# EAGLE board imu_xy (EAGLE 4.11)
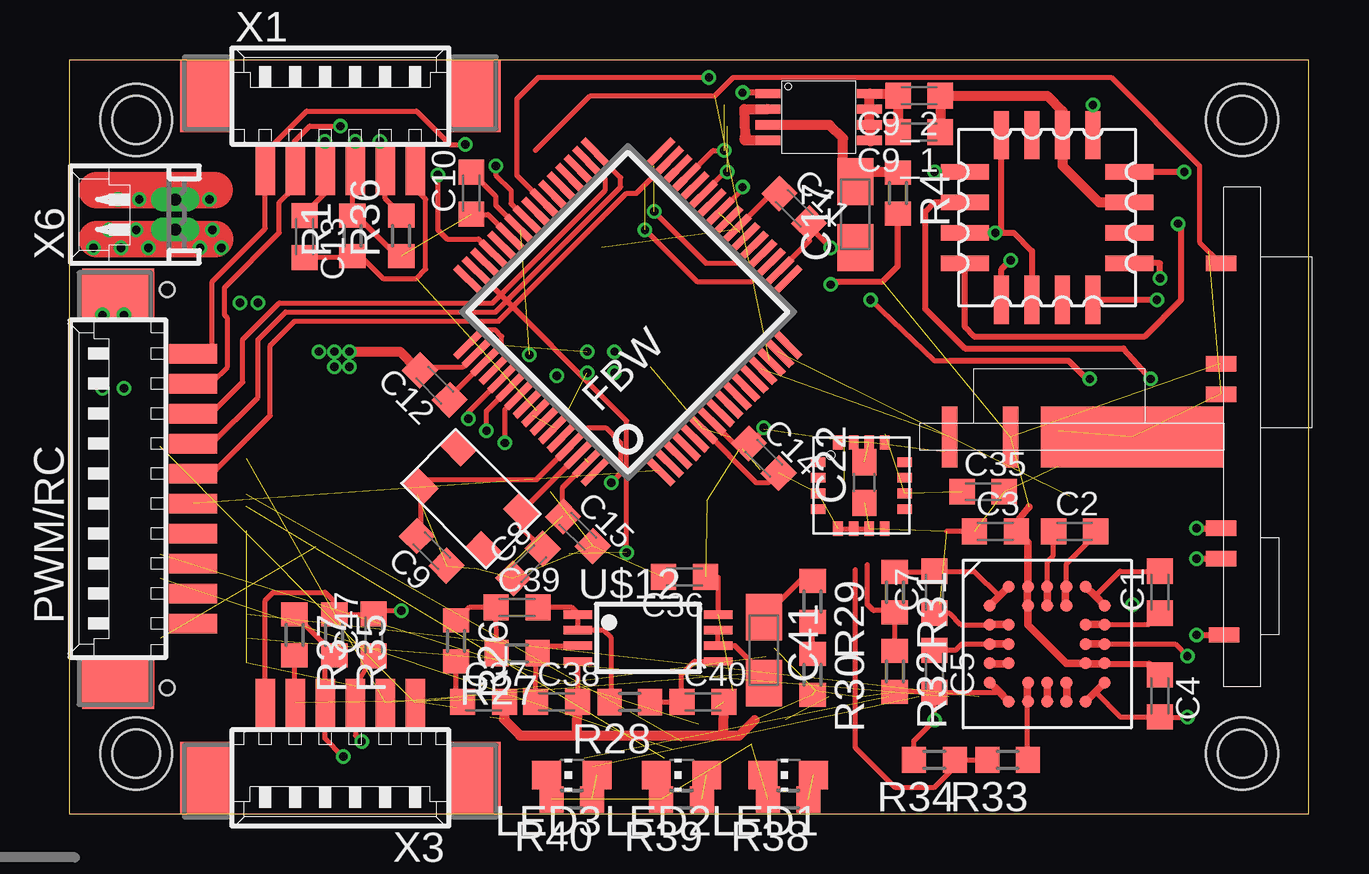
[diagram p0: board, top side]
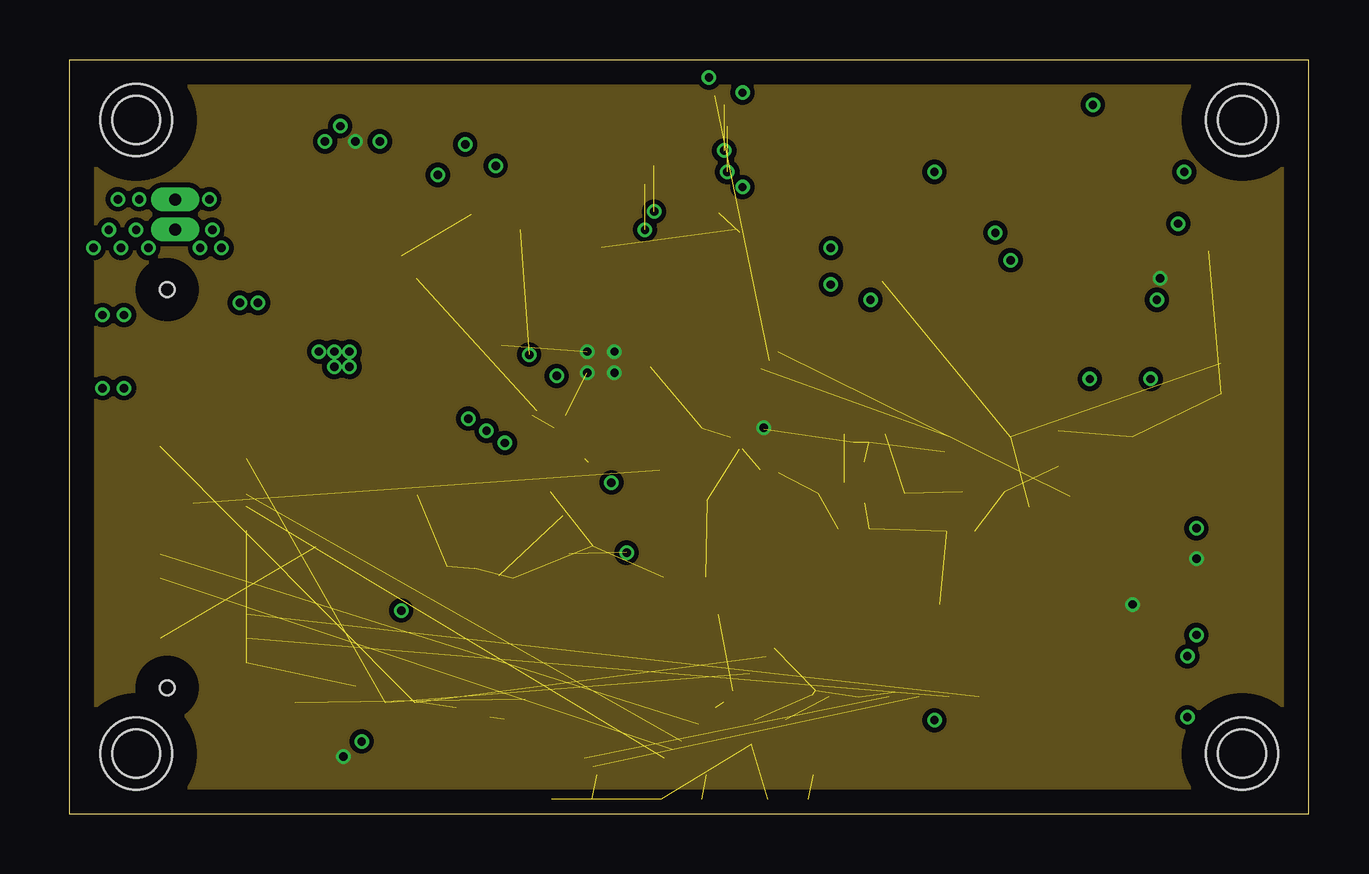
[diagram p1: board, inner layer $Route2]
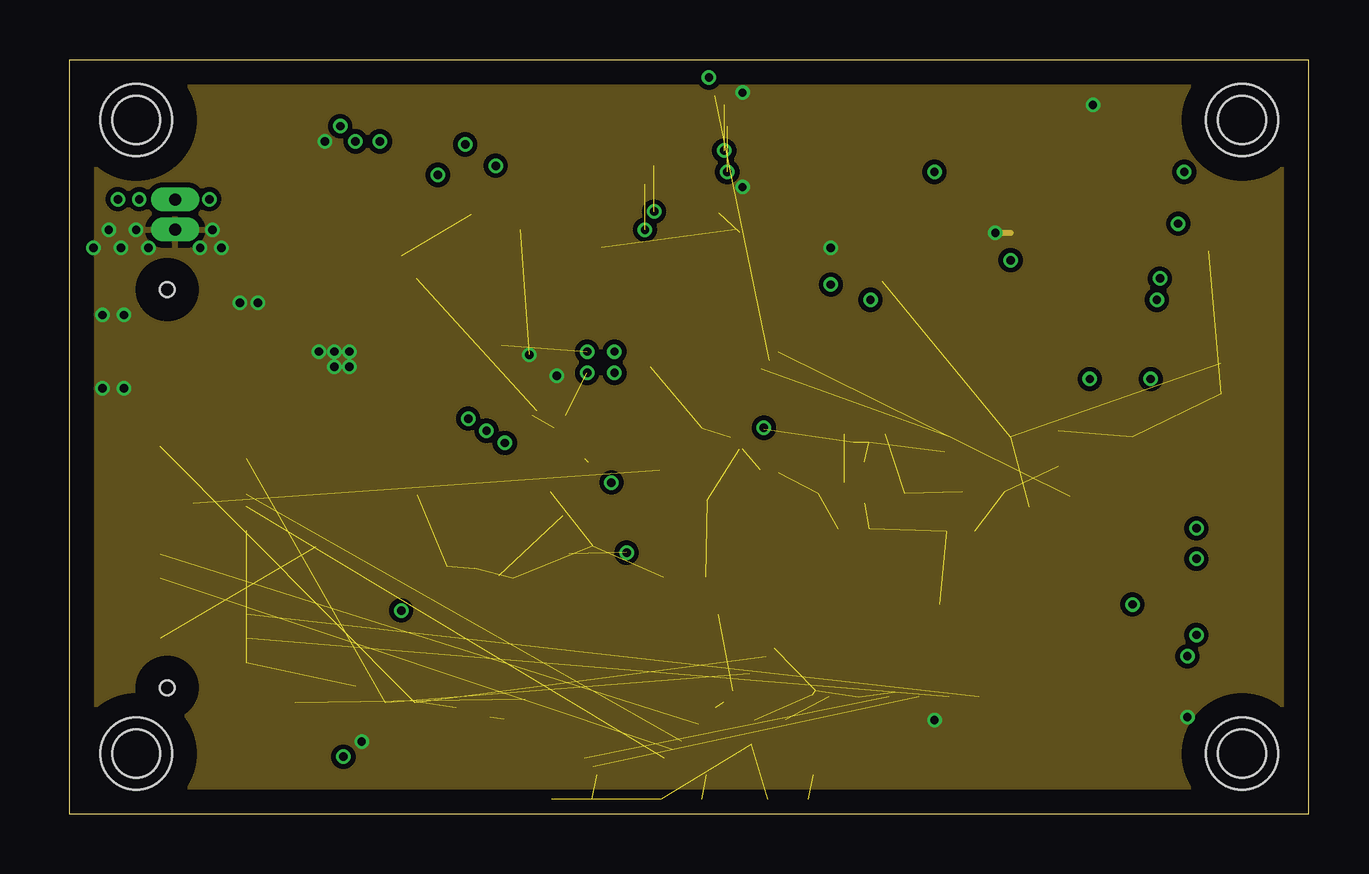
[diagram p2: board, inner layer $Route15]
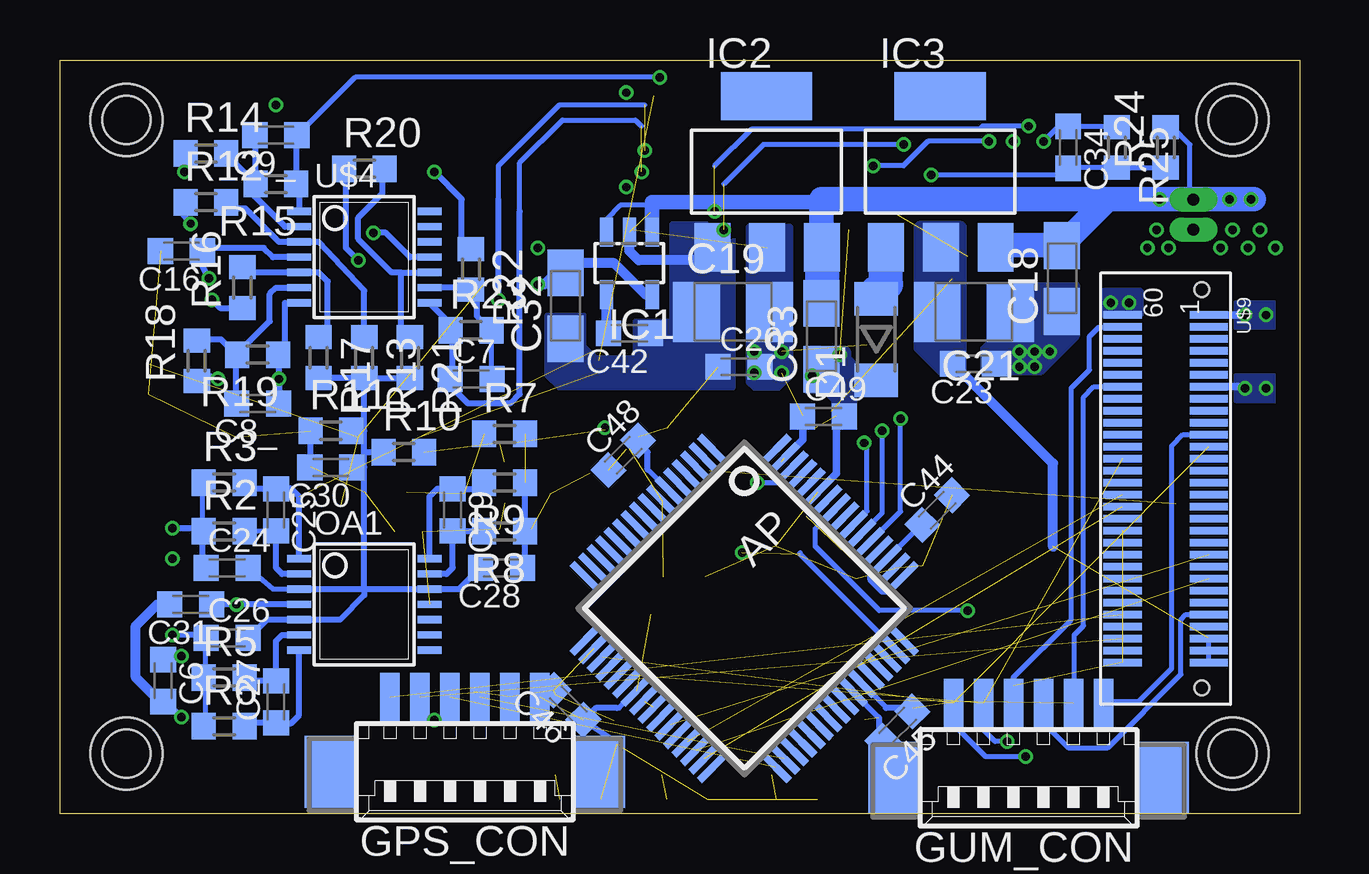
[diagram p3: board, bottom side, seen from below]

Size 51.67 x 31.42 mm. Coordinates in mm from the lower left corner, seen from the top.
Outline: 0,0 51.67,0 51.67,31.42 0,31.42 0,0
Copper layers (1*16): Top 0.035mm / dielectric 1.5mm / Bottom 0.035mm
Design rules "eurocircuits_europrint": minimum track width 0.2mm, minimum drill 0.35mm, track to track 0.2mm, track to pad 0.2mm, pad to pad 0.2mm, via to via 0.2mm, smd to smd 0.2mm, copper to edge 40mil, drill to drill 8mil, minimum pad ring 10mil, minimum via ring 5mil, stop-mask expansion 4mil, vias tented up to drill 0mil, thermal gap 10mil
Holes 2 mm at 48.89,28.92 48.89,2.5 2.79,28.92 2.79,2.5
Holes 3 mm at 2.79,28.92 2.79,2.5 48.89,28.92 48.89,2.5

## Footprints (pad centres in the part's own frame; a part is rotated, then mirrored left to right if it is on the bottom)
SQFP-S-10X10-64 = smd 0.3 x 1.6: 1 -3.75,-5.6; 2 -3.25,-5.6; 3 -2.75,-5.6; 4 -2.25,-5.6; 5 -1.75,-5.6; 6 -1.25,-5.6; 7 -0.75,-5.6; 8 -0.25,-5.6; 9 0.25,-5.6; 10 0.75,-5.6; 11 1.25,-5.6; 12 1.75,-5.6; 13 2.25,-5.6; 14 2.75,-5.6; 15 3.25,-5.6; 16 3.75,-5.6; 33 3.75,5.6; 34 3.25,5.6; 35 2.75,5.6; 36 2.25,5.6; 37 1.75,5.6; 38 1.25,5.6; 39 0.75,5.6; 40 0.25,5.6; 41 -0.25,5.6; 42 -0.75,5.6; 43 -1.25,5.6; 44 -1.75,5.6; 45 -2.25,5.6; 46 -2.75,5.6; 47 -3.25,5.6; 48 -3.75,5.6 | smd 1.6 x 0.3: 17 5.6,-3.75; 18 5.6,-3.25; 19 5.6,-2.75; 20 5.6,-2.25; 21 5.6,-1.75; 22 5.6,-1.25; 23 5.6,-0.75; 24 5.6,-0.25; 25 5.6,0.25; 26 5.6,0.75; 27 5.6,1.25; 28 5.6,1.75; 29 5.6,2.25; 30 5.6,2.75; 31 5.6,3.25; 32 5.6,3.75; 49 -5.6,3.75; 50 -5.6,3.25; 51 -5.6,2.75; 52 -5.6,2.25; 53 -5.6,1.75; 54 -5.6,1.25; 55 -5.6,0.75; 56 -5.6,0.25; 57 -5.6,-0.25; 58 -5.6,-0.75; 59 -5.6,-1.25; 60 -5.6,-1.75; 61 -5.6,-2.25; 62 -5.6,-2.75; 63 -5.6,-3.25; 64 -5.6,-3.75
C0603K = smd 1.05 x 1.08: 1 -0.875,0; 2 0.875,0
A/3216-18R = smd 1.95 x 1.5: + 1.375,0; - -1.375,0
B/3528-21R = smd 1.95 x 2.5: + 1.525,0; - -1.525,0
C0603 = smd 1.1 x 1: 1 -0.85,0; 2 0.85,0
SOD80 = smd 1.4 x 1.8: 1 -1.7,0; 2 1.7,0
53261-06 = smd 0.8 x 2: 1 3.125,-2.5; 2 1.875,-2.5; 3 0.625,-2.5; 4 -0.625,-2.5; 5 -1.875,-2.5; 6 -3.125,-2.5 | smd 2.1 x 3: S1 5.625,0.625; S2 -5.625,0.625
BC-32 = smd 0.5 x 0.5: A2 -1.6,2.4; A3 -0.8,2.4; A4 0,2.4; A5 0.8,2.4; A6 1.6,2.4; B1 -2.4,1.6; B3 -0.8,1.6; B4 0,1.6; B5 0.8,1.6; B7 2.4,1.6; C1 -2.4,0.8; C2 -1.6,0.8; C6 1.6,0.8; C7 2.4,0.8; D1 -2.4,0; D2 -1.6,0; D6 1.6,0; D7 2.4,0; E1 -2.4,-0.8; E2 -1.6,-0.8; E6 1.6,-0.8; E7 2.4,-0.8; F1 -2.4,-1.6; F3 -0.8,-1.6; F4 0,-1.6; F5 0.8,-1.6; F7 2.4,-1.6; G2 -1.6,-2.4; G3 -0.8,-2.4; G4 0,-2.4; G5 0.8,-2.4; G6 1.6,-2.4
SOT23-5 = smd 0.55 x 1.2: 1 -0.95,-1.3; 2 0,-1.3; 3 0.95,-1.3; 4 0.95,1.3; 5 -0.95,1.3
SOT223 = smd 1.499 x 2.007: 1 -2.261,-3.15; 2 0.025,-3.15; 3 2.311,-3.15 | smd 3.81 x 2.007: 4 0,3.15
CHIP-LED0805 = smd 1.2 x 1.2: A 0,-1.05; C 0,1.05
TSSOP14 = smd 0.305 x 0.991: 1 -1.905,-2.718; 2 -1.27,-2.718; 3 -0.635,-2.718; 4 0,-2.718; 5 0.635,-2.718; 6 1.27,-2.718; 7 1.905,-2.718; 8 1.905,2.718; 9 1.27,2.718; 10 0.635,2.718; 11 0,2.718; 12 -0.635,2.718; 13 -1.27,2.718; 14 -1.905,2.718
53261-10 = smd 0.8 x 2: 1 5.625,-2.5; 2 4.375,-2.5; 3 3.125,-2.5; 4 1.875,-2.5; 5 0.625,-2.5; 6 -0.625,-2.5; 7 -1.875,-2.5; 8 -3.125,-2.5; 9 -4.375,-2.5; 10 -5.625,-2.5 | smd 2.1 x 3: S1 8.125,0.625; S2 -8.125,0.625
R0603 = smd 1 x 1.1: 1 -0.85,0; 2 0.85,0
LCC16 = smd 0.635 x 2.007: 1 1.905,3.429; 2 0.635,3.429; 3 -0.635,3.429; 4 -1.905,3.429; 9 -1.905,-3.429; 10 -0.635,-3.429; 11 0.635,-3.429; 12 1.905,-3.429 | smd 2.007 x 0.635: 5 -3.429,1.905; 6 -3.429,0.635; 7 -3.429,-0.635; 8 -3.429,-1.905; 13 3.429,-1.905; 14 3.429,-0.635; 15 3.429,0.635; 16 3.429,1.905
CTS_CRYSTAL = smd 1.2 x 0.9: P$1 -1.85,-1.1; P$2 1.85,-1.1; P$3 1.85,1.1; P$4 -1.85,1.1
MICRO8 = smd 0.381 x 1.041: P$1 -0.978,-2.121; P$2 -0.33,-2.121; P$3 0.33,-2.121; P$4 0.978,-2.121; P$5 0.978,2.121; P$6 0.33,2.121; P$7 -0.33,2.121; P$8 -0.978,2.121
LSCFP = smd 0.6 x 0.4: P$1 -1.8,0.975; P$2 -1.8,0.325; P$3 -1.8,-0.325; P$4 -1.8,-0.975; P$9 1.8,-0.975; P$10 1.8,-0.325; P$11 1.8,0.325; P$12 1.8,0.975 | smd 0.4 x 0.6: P$5 -0.975,-1.8; P$6 -0.325,-1.8; P$7 0.325,-1.8; P$8 0.975,-1.8; P$13 0.975,1.8; P$14 0.325,1.8; P$15 -0.325,1.8; P$16 -0.975,1.8
DF12 = smd 1.6 x 0.3: 1 -1.8,-7.25; 2 -1.8,-6.75; 3 -1.8,-6.25; 4 -1.8,-5.75; 5 -1.8,-5.25; 6 -1.8,-4.75; 7 -1.8,-4.25; 8 -1.8,-3.75; 9 -1.8,-3.25; 10 -1.8,-2.75; 11 -1.8,-2.25; 12 -1.8,-1.75; 13 -1.8,-1.25; 14 -1.8,-0.75; 15 -1.8,-0.25; 16 -1.8,0.25; 17 -1.8,0.75; 18 -1.8,1.25; 19 -1.8,1.75; 20 -1.8,2.25; 21 -1.8,2.75; 22 -1.8,3.25; 23 -1.8,3.75; 24 -1.8,4.25; 25 -1.8,4.75; 26 -1.8,5.25; 27 -1.8,5.75; 28 -1.8,6.25; 29 -1.8,6.75; 30 -1.8,7.25; 31 1.8,7.25; 32 1.8,6.75; 33 1.8,6.25; 34 1.8,5.75; 35 1.8,5.25; 36 1.8,4.75; 37 1.8,4.25; 38 1.8,3.75; 39 1.8,3.25; 40 1.8,2.75; 41 1.8,2.25; 42 1.8,1.75; 43 1.8,1.25; 44 1.8,0.75; 45 1.8,0.25; 46 1.8,-0.25; 47 1.8,-0.75; 48 1.8,-1.25; 49 1.8,-1.75; 50 1.8,-2.25; 51 1.8,-2.75; 52 1.8,-3.25; 53 1.8,-3.75; 54 1.8,-4.25; 55 1.8,-4.75; 56 1.8,-5.25; 57 1.8,-5.75; 58 1.8,-6.25; 59 1.8,-6.75; 60 1.8,-7.25 | hole 0.61: -1.5,8.3; -1.5,-8.3
TSSOP8 = smd 0.35 x 1.2: 1 -0.975,-2.925; 2 -0.325,-2.925; 3 0.325,-2.925; 4 0.975,-2.925; 5 0.975,2.925; 6 0.325,2.925; 7 -0.325,2.925; 8 -0.975,2.925
53048-02 = drill 0.5 pad 0.698 long: 1 0.625,-1.25; 2 -0.625,-1.25
IMU_XZ = smd 0.635 x 2.54: +5V -2.54,0; RATE_Y -5.08,0 | smd 7.62 x 2.54: GND 2.54,0
IMU_YZ_2 = smd 0.635 x 1.27: +3V3 5.08,-0.889; +5V -3.048,-0.889; ACCEL_Y 3.81,-0.889; ACCEL_Z 8.255,-0.762; GND -1.778,-0.889; RATE_X -7.239,-0.889

## Placement (x,y rotation side)
AP  LPC2148  [SQFP-S-10X10-64]  23.15,8.56 225 bottom
C1  22nF  [C0603K]  45.46,9.23 90 top
C2  22nF  [C0603K]  41.91,11.77 0 top
C3  100nF  [C0603K]  38.6,11.77 0 top
C4  100nF  [C0603K]  45.46,4.92 270 top
C5  100nF  [C0603K]  36.06,5.93 270 top
C6  47nF  [C0603K]  47.37,5.55 270 bottom
C7  22nF  [C0603K]  36.06,9.23 90 top
C7_  150pF  [C0603K]  34.54,18.12 0 bottom
C8  13pF  [C0603K]  19.12,10.43 45 top
C8_  150pF  [C0603K]  43.43,17.11 180 bottom
C9  13pF  [C0603K]  15.11,10.96 135 top
C9_  150pF  [C0603K]  42.67,28.28 180 bottom
C9_1  100nF  [C0603K]  35.43,28.41 180 top
C9_2  100nF  [C0603K]  35.43,29.93 180 top
C10  100nF  [C0603K]  16.76,25.87 90 top
C11  100nF  [C0603K]  30.22,25.23 315 top
C12  100nF  [C0603K]  15.24,17.87 135 top
C13  100nF  [C0603K]  9.81,24.05 270 top
C14  100nF  [C0603K]  28.95,14.82 315 top
C15  100nF  [C0603K]  21.2,11.77 315 top
C16  100nF  [C0603K]  46.6,23.46 180 bottom
C17  10uF  [A/3216-18R]  32.76,24.98 90 top
C18  10uF  [A/3216-18R]  9.9,22.31 90 bottom
C19  22uF  [B/3528-21R]  23.62,20.92 0 bottom
C20  100nF  [C0603K]  23.36,18.63 0 bottom
C21  22uF  [B/3528-21R]  13.58,20.92 180 bottom
C22  100nF  [C0603]  33.14,13.81 90 top
C23  100nF  [C0603K]  13.58,18.76 180 bottom
C24  100nF  [C0603K]  44.7,10.25 0 bottom
C25  10nF  [C0603K]  42.67,12.66 270 bottom
C26  100nF  [C0603K]  44.7,7.33 0 bottom
C27  10nF  [C0603K]  42.67,4.66 90 bottom
C28  100nF  [C0603K]  33.27,10.25 180 bottom
C29  10nF  [C0603K]  35.3,12.66 270 bottom
C30  100nF  [C0603K]  40.38,14.44 180 bottom
C31  100nF  [C0603K]  46.22,8.73 180 bottom
C32  10uF  [A/3216-18R]  30.6,21.17 90 bottom
C33  10uF  [A/3216-18R]  19.93,19.9 90 bottom
C34  100nF  [C0603K]  9.65,27.77 270 bottom
C35  100nF  [C0603K]  38.09,13.42 0 top
C36  100nF  [C0603K]  25.65,9.87 180 top
C37  3.3nF  [C0603K]  17.27,4.66 0 top
C38  100pF  [C0603K]  20.32,4.66 0 top
C39  220pF  [C0603K]  18.66,8.6 0 top
C40  1nF  [C0603K]  26.41,4.66 0 top
C41  10uF  [A/3216-18R]  28.95,6.82 270 top
C42  10nF  [C0603K]  27.93,20.03 180 bottom
C44  100nF  [C0603K]  15.11,12.66 45 bottom
C45  100nF  [C0603K]  16.76,3.64 225 bottom
C46  100nF  [C0603K]  30.47,4.53 135 bottom
C47  100nF  [C0603K]  12.69,7.46 90 top
C48  100nF  [C0603K]  28.19,14.95 45 bottom
C49  100nF  [C0603K]  19.84,16.56 0 bottom
D1  [SOD80]  17.65,19.77 90 bottom
FBW  LPC2148  [SQFP-S-10X10-64]  23.29,20.92 45 top
GPS_CON  [53261-06]  34.79,2.38 180 bottom
GUM_CON  [53261-06]  11.3,2.12 180 bottom
GYRO_Z  ADXR  [BC-32]  40.76,7.07 0 top
IC1  LP2992  [SOT23-5]  27.93,22.95 180 bottom
IC2  REG1117  [SOT223]  22.22,26.76 0 bottom
IC3  REG1117  [SOT223]  14.98,26.76 0 bottom
LED1  [CHIP-LED0805]  29.97,1.61 90 top
LED2  [CHIP-LED0805]  25.52,1.61 90 top
LED3  [CHIP-LED0805]  20.95,1.61 90 top
OA1  AD8554ARU  [TSSOP14]  38.98,8.73 270 bottom
PWM/RC  [53261-10]  2.66,13.55 90 top
R1  10K  [R0603]  11.81,24.09 90 top
R2  390k  [R0603]  44.83,11.77 0 bottom
R3  470k  [R0603]  44.83,13.81 0 bottom
R4  220R  [R0603]  34.54,25.87 270 top
R5  390k  [R0603]  44.83,5.68 0 bottom
R6  470k  [R0603]  44.83,3.64 0 bottom
R7  120k  [R0603]  33.14,15.84 0 bottom
R8  390k  [R0603]  33.14,11.77 180 bottom
R9  470k  [R0603]  33.14,13.81 180 bottom
R10  120K  [R0603]  37.33,15.08 0 bottom
R11  120K  [R0603]  40.38,15.96 0 bottom
R12  4.99k  [R0603]  45.59,25.49 0 bottom
R13  1M  [R0603]  38.98,19.01 270 bottom
R14  4.99k  [R0603]  45.59,27.52 0 bottom
R15  1M  [R0603]  42.67,26.25 180 bottom
R16  4.99k  [R0603]  44.06,21.93 90 bottom
R17  1M  [R0603]  40.89,19.01 270 bottom
R18  4.99k  [R0603]  45.97,18.88 90 bottom
R19  1M  [R0603]  43.43,19.14 180 bottom
R20  4.99k  [R0603]  38.98,26.89 0 bottom
R21  1M  [R0603]  37.08,19.01 270 bottom
R22  4.99k  [R0603]  34.54,22.7 270 bottom
R23  1M  [R0603]  34.54,20.15 0 bottom
R24  10k  [R0603]  5.58,27.77 90 bottom
R25  4.7K  [R0603]  7.61,27.77 270 bottom
R26  100K  [R0603]  16.12,7.2 270 top
R27  56K  [R0603]  18.66,6.69 180 top
R28  12K  [R0603]  23.36,4.66 180 top
R29  12K  [R0603]  30.98,8.85 270 top
R30  12K  [R0603]  30.98,5.8 270 top
R31  120k  [R0603]  34.41,9.23 270 top
R32  120k  [R0603]  34.41,5.93 270 top
R33  120k  [R0603]  39.11,2.25 180 top
R34  120k  [R0603]  36.06,2.25 180 top
R35  10K  [R0603]  11.04,7.46 270 top
R36  10K  [R0603]  13.84,24.09 90 top
R37  10K  [R0603]  9.39,7.46 270 top
R38  10K  [R0603]  29.97,0.6 180 top
R39  10K  [R0603]  25.52,0.6 180 top
R40  10K  [R0603]  20.95,0.6 180 top
U$1  HMC1053  [LCC16]  40.76,24.85 270 top
U$3  14.764Mhz  [CTS_CRYSTAL]  16.74,13.13 315 top
U$4  AD8554ARU  [TSSOP14]  38.98,23.2 270 bottom
U$5  IRF7509  [MICRO8]  31.24,29.04 270 top
U$7  ADXL320  [LSCFP]  33.02,13.68 0 top
U$9  BASIXHEADER  [DF12]  5.58,13.55 180 bottom
U$12  AD8552RU  [TSSOP8]  24.12,7.33 270 top
X1  [53261-06]  11.3,29.3 0 top
X3  [53261-06]  11.3,2.12 180 top
X6  [53048-02]  3.17,24.98 90 top
XZ_BOARD  IMU_XZ  [IMU_XZ]  41.78,15.71 0 top
YZ_BOARD  IMU_YZ2  [IMU_YZ_2]  48.89,15.71 270 top

## Library data of the parts
AP FBW GYRO_Z OA1 U$1 U$3-U$5 U$7 U$12 XZ_BOARD YZ_BOARD = paparazzi
C1-C7 C7_ C8 C8_ C9 C9_ C9_1 C9_2 C10-C42 C44-C49 R1-R40 = rcl
D1 = semicon-smd-ipc
GPS_CON GUM_CON PWM/RC X1 X3 X6 = con-molex
IC1 = v-reg-micrel
IC2 IC3 = burr-brown
LED1-LED3 = led
U$9 = gumstix

## Nets
+3V3: AP.7 AP.23 AP.43 AP.49 AP.51 AP.63 C10.1 C11.1 C12.1 C14.1 C15.1 C16.1 C19.+ C20.2 C22.2 C31.1 C36.1 C44.1 C45.1 C46.1 C48.1 C49.1 FBW.7 FBW.23 FBW.43 FBW.49 FBW.51 FBW.63 GPS_CON.6 GUM_CON.1 IC2.2 OA1.4 R1.2 R10.2 R35.2 R36.1 R37.1 R38.2 R39.2 R40.2 U$1.1 U$4.4 U$7.P$14 U$7.P$15 U$12.8 X1.3 X3.3 YZ_BOARD.+3V3
+3V3/2: C24.2 C26.2 C28.2 C30.1 OA1.3 OA1.5 OA1.12 R10.1 R11.2 R13.2 R17.2 R21.2
+3V7_GUM: C21.+ C23.2 IC3.2 U$9.28 U$9.29 U$9.30
+5V: C3.2 C4.1 C32.+ GYRO_Z.A3 GYRO_Z.B3 GYRO_Z.E6 GYRO_Z.E7 IC1.5 R4.2 XZ_BOARD.+5V YZ_BOARD.+5V
ACCEL_X: C29.1 OA1.14 R9.2
ACCEL_Y: C25.1 FBW.15 OA1.1 R3.2
ACCEL_Z: C27.1 OA1.7 R6.2
AP_AUDIO_OUT: AP.9
AP_P0.14: AP.41 R37.2 X3.2
AP_RESET: AP.57 C47.2 R35.1 X3.1
AP_RXD0: AP.21 U$9.48 X3.5
AP_RXD1: AP.34 GPS_CON.4
AP_TXD0: AP.19 U$9.12 X3.6
AP_TXD1: AP.33 GPS_CON.3
AUDIO_OUT: C37.1 R26.2
FBW_D+: FBW.10
FBW_D-: FBW.11
FBW_P0.14: FBW.41 R36.2 X1.2
FBW_PWM1: FBW.19 PWM/RC.1 X1.6
FBW_PWM2: FBW.31 PWM/RC.5
FBW_PWM3: FBW.21 PWM/RC.2 X1.5
FBW_PWM4: FBW.33 PWM/RC.4
FBW_PWM5: FBW.1 PWM/RC.6
FBW_PWM6: FBW.34 PWM/RC.3
FBW_RESET: C13.2 FBW.57 R1.1 X1.1
FOO: FBW.30
GND: AP.6 AP.18 AP.25 AP.42 AP.50 AP.59 C3.1 C4.2 C5.2 C6.2 C8.1 C9.1 C10.2 C11.2 C12.2 C13.1 C14.2 C15.2 C16.2 C17.- C18.- C19.- C20.1 C21.- C22.1 C23.1 C30.2 C31.2 C32.- C33.- C34.1 C35.2 C36.2 C37.2 C38.2 C40.2 C42.1 C44.2 C45.2 C46.2 C47.1 C48.2 C49.2 D1.1 FBW.6 FBW.18 FBW.25 FBW.42 FBW.50 FBW.59 GPS_CON.5 GUM_CON.2 GYRO_Z.F1 GYRO_Z.F7 GYRO_Z.G2 GYRO_Z.G6 IC1.2 IC2.1 OA1.11 R11.1 R25.1 R30.2 R32.2 R34.2 U$1.5 U$1.8 U$1.11 U$1.14 U$4.11 U$5.P$1 U$7.P$3 U$7.P$5 U$7.P$6 U$7.P$7 U$9.1 U$9.7 U$9.31 U$9.42 U$9.60 U$12.4 X1.4 X3.4 X6.2 XZ_BOARD.GND YZ_BOARD.GND
GUM_HW_RXD: GPS_CON.2 U$9.33
GUM_HW_TXD: GPS_CON.1 U$9.35
GUM_USB_N: GUM_CON.3 U$9.59
GUM_USB_P: GUM_CON.6 U$9.11
GUM_XRXD: GUM_CON.5 U$9.54
GUM_XTXD: GUM_CON.4 U$9.26
LPC_CLOCK: AP.62 C9.2 FBW.61 U$3.P$1
MAG_A: C8_.1 FBW.29 R19.1 U$4.7
MAG_B: C9_.1 FBW.39 R15.1 U$4.1
MAG_C: C7_.1 FBW.27 R23.1 U$4.8
N$1: C1.2 GYRO_Z.A6 GYRO_Z.B7
N$2: C1.1 GYRO_Z.C6 GYRO_Z.C7
N$3: C2.2 GYRO_Z.A5 GYRO_Z.B5
N$4: C2.1 GYRO_Z.A4 GYRO_Z.B4
N$5: GYRO_Z.E1 GYRO_Z.E2
N$6: C39.1 R26.1 R27.2
N$7: C8.2 FBW.62 U$3.P$3
N$8: C7.1 GYRO_Z.C1 GYRO_Z.C2
N$9: C6.1 GYRO_Z.D6 GYRO_Z.D7
N$10: C5.1 GYRO_Z.D1 GYRO_Z.D2
N$11: LED1.A R38.1
N$12: LED2.A R39.1
N$13: C9_1.2 C9_2.2 U$5.P$5 U$5.P$6 U$5.P$7 U$5.P$8
N$14: D1.2 IC3.1
N$15: C38.1 R27.1 U$12.3
N$16: C9_1.1 C9_2.1 U$1.3 U$1.6
N$17: C39.2 R28.2 U$12.1 U$12.2
N$18: C40.1 R28.1 U$12.5
N$19: C41.+ U$12.6 U$12.7
N$20: C41.- R29.1
N$21: R29.2 R30.1
N$22: C24.1 R2.1 R3.1 YZ_BOARD.ACCEL_Y
N$23: C42.2 IC1.4
N$24: FBW.35
N$25: FBW.38
N$26: LED3.A R40.1
N$29: C25.2 OA1.2 R2.2
N$30: C26.1 R5.1 R6.1 YZ_BOARD.ACCEL_Z
N$31: C27.2 OA1.6 R5.2
N$32: FBW.2
N$33: C28.1 R7.2 R8.1 R9.1
N$34: C29.2 OA1.13 R8.2
N$35: C35.1 R7.1 U$7.P$10
N$36: LED1.C
N$37: FBW.9
N$38: R16.2 R17.1 U$4.5
N$39: R12.2 R13.1 U$4.3
N$40: C9_.2 R14.2 R15.2 U$4.2
N$41: LED2.C
N$42: C8_.2 R18.2 R19.2 U$4.6
N$43: LED3.C
N$46: R20.2 R21.1 U$4.10
N$47: C7_.2 R22.2 R23.2 U$4.9
N$49: PWM/RC.7
N$50: PWM/RC.8
N$51: PWM/RC.9
N$52: PWM/RC.10
OUT+_A: R16.1 U$1.16
OUT+_B: R12.1 U$1.12
OUT+_C: R20.1 U$1.13
OUT-_A: R18.1 U$1.10
OUT-_B: R14.1 U$1.4
OUT-_C: R22.1 U$1.9
RATE_X_3V3: FBW.14 YZ_BOARD.RATE_X
RATE_Y_3V3: FBW.13 XZ_BOARD.RATE_Y
RATE_Z: C7.2 GYRO_Z.A2 GYRO_Z.B1 R31.1
RATE_Z_3V3: R31.2 R32.1
SET/RESET: U$5.P$2 U$5.P$4
SPI0_MISO: AP.53 FBW.53
SPI0_MOSI: AP.54 FBW.54
SPI0_SCK: AP.47 FBW.47
SPI0_SS: AP.55 FBW.55
SPI1_MISO: AP.29 U$9.45
SPI1_MOSI: AP.30 U$9.23
SPI1_SCK: AP.27 U$9.21
SPI1_SS: AP.31 U$9.44
ST1: GYRO_Z.F5 GYRO_Z.G5
ST2: GYRO_Z.F4 GYRO_Z.G4
TEMP: GYRO_Z.F3 GYRO_Z.G3 R33.1
TEMP_3V3: R33.2 R34.1
VBAT_LYPO: C18.+ C33.+ IC1.1 IC1.3 IC2.3 IC3.3 R24.2 X6.1
VBAT_MEAS: C34.2 FBW.45 R24.1 R25.2
VS/R: C17.+ R4.1 U$5.P$3

## Tracks (layer width: path | path; a pad name or v marks a point on that pad's centre or on a via)
+3V3  (via drill 0.35)  (19 unrouted)
  Top 0.203: U$12.8 27.05,8.34 27.05,9.87 C36.1 | C15.1 20.57,12.41 20.57,13.6 FBW.63 | X3.3 | R35.2 10.66,6.22 X3.3 | R35.2 11.04,6.57 | R37.1 11.04,6.65 R35.2 | X3.3 10.66,3.14 v11.43,2.38 | FBW.49 17.22,20.15 17.78,20.15 18.03,19.9 18.03,19.55 FBW.51 15.87,17.39 15.87,17.23 | X1.3 | X1.3 v11.93,28.03 | FBW.7 27.93,15.21 27.93,15.2 28.06,15.2 C14.1 28.95,16.02 v28.95,16.09 | C11.1 29.59,25.8 29.59,25.74 29.18,25.74 FBW.23 | X1.3 11.81,26.68 R1.2 11.97,24.94 13.67,23.24 R36.1 | 15.87,17.23 | C12.1 15.87,17.23 | C10.1 16.76,25.02 16.76,24.98 17.46,24.98 FBW.43
  Top 0.254: U$1.1 45.46,22.95 v45.46,22.31 | YZ_BOARD.+3V3 v46.98,10.63
  Bottom 0.203: 15.74,12.15 15.76,12.15 | C44.1 15.74,12.1 15.74,12.15 | 15.66,12.15 15.74,12.15 | 15.66,12.15 AP.51 17.9,9.92 17.9,9.74 17.39,9.23 17.17,9.23 AP.49 | 15.66,12.15 15.49,12.15 | 17.23,4.41 17.27,4.41 17.27,4.45 AP.43 | AP.23 28.36,4.41 28.46,4.41 | GUM_CON.1 14.47,4.66 14.47,3.77 13.08,2.38 v11.43,2.38
  Bottom 0.254: U$4.4 42.79,23.2 43.17,23.58 45.71,23.58 45.75,23.54 C16.1 45.75,22.91 v45.46,22.31 | OA1.4 v44.32,8.73 C31.1 45.46,8.73 | C45.1 16.12,4.28 16.12,4.41 17.23,4.41 | 28.46,4.41 29.33,4.41 29.84,3.9 | 29.84,3.9 | 29.84,3.9 C46.1 28.44,2.95 28.44,2.88
  Bottom 0.305: 20.7,16.56 20.7,16.6 | 20.7,16.56 C49.1 | AP.63 20.7,15.61 20.7,16.56
  other vias: 22.73,19.27 22.73,18.38 21.58,19.27 21.58,18.38
  pour $Route2: 51.3,31.08 0.25,31.08 0.25,0.34 51.3,0.34
  pour Bottom (no thermals): 21.2,24.47 22.98,24.47 22.98,18 22.73,17.74 21.71,17.74 21.2,18.25
+3V3/2
  Bottom 0.203: OA1.3 42.79,9.36 C24.2
  Bottom 0.254: R21.2 38.94,18.16 38.98,18.12 | R17.2 40.89,18.25 40.8,18.16 R13.2 38.98,18.12 | 38.98,15.08 R10.1 | 38.98,15.08 38.98,15.96 | 38.98,15.96 38.98,18.12 | 38.98,15.96 R11.2 | C26.2 43.81,7.33 43.05,8.09 OA1.5 40,8.09 38.98,9.11 38.98,9.36 | 38.98,9.36 38.98,14.44 | 38.98,14.44 38.98,15.08 | 38.98,9.36 OA1.3 | 38.98,9.36 OA1.12 35.05,9.36 34.16,10.25 C28.2 | 38.98,14.44 C30.1
+3V7_GUM  (1 unrouted)
  Bottom 0.203: U$9.29 3.8,6.82 | U$9.29 U$9.28 | U$9.30 U$9.29 | U$9.28 | U$9.28 3.8,7.33
  Bottom 0.406: C23.2 10.28,14.61 10.28,11.14
  pour Bottom (no thermals): 14.09,24.6 15.87,24.6 16,24.47 16,19.39 14.98,18.38 14.09,18.38 13.96,18.5 13.96,24.09 13.96,24.47
+5V  (via drill 0.35)  (3 unrouted)
  Top 0.254: C4.1 45.46,5.8 45.02,6.25 43.17,6.25 | v31.75,22.06 31.87,22.19 33.9,22.19 34.54,22.82 R4.2
  Top 0.305: GYRO_Z.E7 43.17,6.26 43.17,6.25 42.39,6.25 GYRO_Z.E6 41.56,6.27 39.96,7.87 GYRO_Z.B3 39.95,8.66 39.94,8.66 39.94,9.45 GYRO_Z.A3 39.96,11.3 C3.2 39.48,12.14 40,12.79
  Bottom 0.406: IC1.5 27.27,21.65 28.57,22.95 30.6,22.95 | 30.6,22.95 C32.+ | 30.6,22.95 31.49,22.06 v31.75,22.06
ACCEL_X
  Bottom 0.254: OA1.14 36.27,13.22 35.94,13.55 35.43,13.55 35.41,13.54 C29.1 34.05,13.54 33.99,13.59 R9.2
ACCEL_Y  (1 unrouted)
  Bottom 0.203: 43.81,13.81 R3.2
  Bottom 0.254: OA1.1 41.7,13.22 42.03,13.55 C25.1 43.54,13.54 43.81,13.81
ACCEL_Z
  Bottom 0.254: OA1.7 41.7,4.1 42.03,3.77 42.67,3.77 C27.1 43.8,3.79 43.94,3.64 R6.2
AP_P0.14  (1 unrouted)
  Top 0.203: X3.2 9.39,4.65 R37.2
AP_RESET  (via drill 0.35)
  Top 0.203: X3.1 8.17,8.9 8.5,9.23 10.66,9.23 11.04,8.85 R35.1 | R35.1 11.04,8.22 | R35.1 12.66,8.3 12.69,8.34 C47.2 12.86,8.47 v13.84,8.47
  Bottom 0.203: AP.57 20.19,11.87 20.19,11.14 17.52,8.47 v13.84,8.47
AP_RXD0  (2 unrouted)
AP_RXD1  (1 unrouted)
AP_TXD0  (2 unrouted)
AP_TXD1  (1 unrouted)
AUDIO_OUT
  Top 0.203: 16.42,4.62 16.5,4.53 | C37.1 16.42,4.62 | R26.2 16.12,4.92 16.42,4.62
FBW_P0.14  (via drill 0.35)
  Top 0.203: R36.2 13.84,24.98 13.17,25.65 X1.2 13.17,27.8 v12.95,28.03 | FBW.41 18.41,25.44 18.41,26 17.78,26.63 v17.78,27.01
  Bottom 0.203: v12.95,28.03 15.49,28.03 16.5,27.01 v17.78,27.01
FBW_PWM1  (via drill 0.35)  (1 unrouted)
  Top 0.203: FBW.19 28.45,22.19 26.16,22.19 v24,24.35 | X1.6 8.25,26.89 8.25,27.65 9.9,29.3 14.47,29.3 15.87,27.9 v16.5,27.9 | X1.6 | X1.6 8.17,24.4 5.96,22.19 5.96,19.39 5.71,19.14 5.2,19.14 PWM/RC.1
  Bottom 0.203: v16.5,27.9 22.35,27.9 24,26.25
FBW_PWM2
  Top 0.203: FBW.31 23.65,25.87 23.24,25.87 17.9,20.54 9.39,20.54 8.38,19.52 8.38,16.6 5.96,14.19 PWM/RC.5
FBW_PWM3  (via drill 0.35)  (1 unrouted)
  Top 0.203: FBW.21 27.8,22.95 26.54,22.95 v24.38,25.11 | PWM/RC.2 5.16,17.96 5.2,18 5.96,18 6.6,18.63 6.6,20.66 6.47,20.79 6.47,21.93 8.76,24.22 8.76,25.49 9.39,26.12 9.39,26.77 X1.5 9.42,26.86 9.39,26.89 9.39,28.03 10.03,28.66 v11.3,28.66
  Bottom 0.203: 24.38,27.01 22.86,28.54 13.33,28.54 13.2,28.66 v11.3,28.66
FBW_PWM4
  Top 0.203: FBW.33 22.98,26.53 22.98,26.12 17.78,20.92 9.01,20.92 7.87,19.77 7.87,17.36 5.96,15.46 5.19,15.46 PWM/RC.4
FBW_PWM5  (1 unrouted)
FBW_PWM6
  Top 0.203: FBW.34 22.35,26.45 22.35,26 17.65,21.3 8.76,21.3 7.23,19.77 7.23,18 5.91,16.68 PWM/RC.3
FBW_RESET  (1 unrouted)
  Top 0.203: 14.47,26.75 X1.1 14.47,26.76 14.47,26 14.85,25.62 14.85,22.7 14.47,22.31 13.08,22.31 12.19,23.2 11.81,23.2 | 11.81,23.2 R1.1 | C13.2 9.81,23.2 11.81,23.2
GND  (via drill 0.35)  (30 unrouted)
  Top 0.203: 42.76,5.07 43.8,4.04 C4.2 45.47,4.03 v46.6,4.03 | 38.73,5.17 38.7,5.14 38.62,5.06 C5.2 36.06,5.04 | C38.2 21.2,4.66 C38.2 U$12.4 | U$7.P$7 U$7.P$6 U$7.P$5 | R34.2 35.21,3.05 v36.06,3.9 36.06,5.04 | C3.1 36.57,11.77 | R32.2 36.02,5.08 36.06,5.04 | X3.4 | C47.1 11.93,5.33 X3.4 | X3.4 11.93,3.26 v12.19,3.01 | X1.4 | X1.4 v10.66,28.03 | C14.2 29.14,13.81 28.63,13.81 FBW.6 | 30.86,24.6 | 30.86,24.6 C11.2 30.79,24.6 30.73,24.6 v31.75,23.58 | FBW.18 30.86,23.89 30.86,24.6 | FBW.25 28.06,26.04 v28.06,26.12 | C13.1 9.81,24.94 9.77,24.98 10.66,25.87 X1.4 | 14.47,18.63 | 14.47,18.63 C12.2 | FBW.50 16.41,18.63 14.47,18.63 | FBW.42 17.78,25.37 17.78,25.74 C10.2 | C10.2 | C10.2
  Top 0.254: U$1.11 v38.6,24.22 38.86,24.22 | U$1.5 v42.67,29.55 | 38.86,24.22 39.36,24.22 40.13,23.46 U$1.14 | 38.86,24.22 U$1.8 | v31.75,23.58 C17.- | U$5.P$1 29.08,30.06 v28.06,30.06
  Top 0.305: 39.17,4.66 GYRO_Z.G2 | 39.17,4.66 38.7,5.14 GYRO_Z.F1 | 39.17,4.66 | GYRO_Z.F7 43.17,5.49 | 43.17,5.49 42.76,5.07 GYRO_Z.G6 | 43.17,5.49
  Top 0.406: C37.2 18.12,3.94 18.79,3.26 21.2,3.26 | 21.2,3.26 27.3,3.26 | C40.2 27.26,3.3 27.3,3.26 | C38.2 21.17,3.3 21.2,3.26 | 27.3,3.26 27.93,3.26 28.57,3.9 | v11.68,19.27 13.79,19.27 14.42,18.63 14.47,18.63 | 4.44,23.46 4.44,23.96 v4.44,24.35
  Top 1.524: 1.14,23.96 4.44,23.96 6.09,23.96
  $Route15 0.254: v38.6,24.22 39.24,24.22
  Bottom 0.203: C6.2 46.48,4.03 v46.6,4.03 | 27.55,15.58 27.55,15.71 | C44.2 14.22,13.55 | 17.52,3.99 17.52,4.03 17.55,4.03 AP.42 | 27.17,14.35 27.17,14.31 27.13,14.31 AP.6 | v12.19,3.01 12.69,3.01 13.2,3.52 13.2,4.53 13.17,4.56 GUM_CON.2 | R25.1 7.65,28.66 9.65,28.66 C34.1 10.07,28.62 v10.66,28.03
  Bottom 0.254: 27.17,14.35 27.17,15.08 27.55,15.46 27.55,15.58 C48.2 | U$4.11 37.08,23.2 38.09,24.22 v38.6,24.22 | C30.2 41.27,14.44 41.23,14.48 R11.1 | C45.2 17.52,3.21 17.52,3.99
  Bottom 0.305: U$9.60 7.36,20.8 | C49.2 19.03,16.6 19.3,16.6 19.3,14.18 AP.59 | U$9.7 2.47,17.8 v2.28,17.74 | v2.29,20.8 v2.28,20.79 U$9.1
  Bottom 0.406: C6.2 47.51,4.67 48.51,5.68 48.51,7.84 47.62,8.73 C31.2 | IC1.2 27.93,23.46 27.55,23.08 24.76,23.08 24.48,23.36 IC2.1
  Bottom 1.016: 9.9,20.66 C18.-
  other vias: 2.79,24.35 2.15,23.58 1.01,23.58 5.96,24.35 5.46,23.58 6.35,23.58 7.87,21.3 7.11,21.3 11.04,19.27 11.68,18.63 11.04,18.63 10.41,19.27 19.17,19.14 20.32,18.25 1.39,17.74 1.39,20.79 1.65,24.35 3.3,23.58
  pour $Route15: 51.3,31.2 0.25,31.2 0.25,0.34 51.3,0.34
  pour Bottom (no thermals): 25.14,17.74 30.86,17.74 31.36,18.25 31.36,20.79 29.84,20.79 29.84,19.52 29.33,19.01 27.68,19.01 27.68,20.54 26.16,20.54 26.16,24.6 23.62,24.6 23.62,17.74
  pour Bottom (no thermals): 6.6,20.79 6.6,21.81 8.25,21.81 8.25,20.79
  pour Bottom (no thermals): 12.95,22.06 9.27,22.06 9.27,19.9 10.79,18.38 13.2,18.38 13.2,19.39 12.95,19.65
  pour Bottom (no thermals): 16.89,18.63 18.41,18.63 18.79,19.01 18.79,19.27 18.92,19.39 20.57,19.39 20.57,17.61 19.81,17.61 19.43,17.23 19.43,16.22 18.54,16.22 18.54,17.49 16.89,17.49
  pour Bottom (no thermals): 1.01,17.23 1.01,18.25 2.66,18.25 2.66,17.23
  pour Bottom (no thermals): 1.01,20.28 1.01,21.3 2.66,21.3 2.66,20.28
GUM_HW_RXD  (1 unrouted)
GUM_HW_TXD  (1 unrouted)
GUM_USB_N
  Bottom 0.203: U$9.59 7.47,20.3 7.49,20.28 8.38,20.28 8.76,19.9 8.76,18.5 9.52,17.74 9.52,8.09 11.93,5.68 11.93,4.66 11.92,4.65 GUM_CON.3
GUM_USB_P
  Bottom 0.203: U$9.11 4.86,15.8 5.33,15.33 5.33,6.06 6.73,4.66 8.12,4.66 GUM_CON.6
GUM_XRXD
  Bottom 0.203: U$9.54 8.57,17.8 9.01,17.36 9.01,7.84 9.39,7.46 9.39,4.79 9.42,4.76 GUM_CON.5 9.39,4.66
GUM_XTXD
  Bottom 0.203: U$9.26 4.74,8.3 4.95,8.09 4.95,5.8 8,2.76 9.65,2.76 10.66,3.77 10.66,4.66 10.67,4.65 GUM_CON.4
LPC_CLOCK  (via drill 0.35)
  Top 0.203: 19.43,13.93 14.93,13.93 U$3.P$1 14.66,11.58 14.6,11.52 14.56,11.56 C9.2 | 19.43,13.93 19.46,13.93 | 19.43,13.93 19.49,13.93 FBW.61 21.64,16.09 22.35,16.09 22.98,15.46 22.98,14.19 v22.6,13.81
  Bottom 0.203: 21.66,13.93 AP.62 21.79,13.81 v22.6,13.81
MAG_A  (via drill 0.35)  (1 unrouted)
  Top 0.203: FBW.29 26.84,27.65 v27.3,27.65 | 36.7,18.88 36.06,18.88 v33.4,21.42
  Top 0.254: v42.54,18.12 42.41,18.12 41.65,18.88 36.7,18.88
  Bottom 0.203: 33.4,25.62 33.4,27.01 30.86,29.55 27.3,29.55
  Bottom 0.254: 42.54,19.14 42.29,19.14 42.29,21.3 U$4.7 | 42.54,17.11 C8_.1 42.54,17.15 v42.54,18.12 42.54,19.14 | 42.54,19.14 R19.1 | v33.4,21.42 33.4,25.62
MAG_B  (via drill 0.35)
  Top 0.203: v26.67,30.7 19.55,30.7 18.66,29.81 18.66,26.6 FBW.39
  Bottom 0.203: 41.78,28.28 39.36,30.7 v26.67,30.7
  Bottom 0.254: U$4.1 41.7,26.17 41.78,26.25 R15.1 41.82,28.12 41.78,28.16 | 41.78,28.16 41.82,28.2 C9_.1 | 41.71,28.22 41.78,28.16 | 41.71,28.22 41.65,28.28 | 41.78,28.28 41.71,28.22
MAG_C  (via drill 0.35)  (1 unrouted)
  Top 0.203: FBW.27 27.36,26.76 v27.43,26.76
  Bottom 0.203: 27.43,28.66 27.68,28.92 30.73,28.92 32.51,27.14 32.51,25.11
  Bottom 0.254: U$4.8 35.3,20.33 35.3,20.15 R23.1 35.3,20.07 35.3,18.21 C7_.1 35.39,17.83 34.67,17.11 32.89,17.11 32.51,17.49 32.51,25.11
N$1
  Top 0.203: C1.2 43.8,10.11 42.76,9.07
  Top 0.305: GYRO_Z.B7 43.17,8.66 | 43.17,8.66 42.76,9.07 GYRO_Z.A6 | 43.17,8.66
N$2
  Top 0.203: C1.1 45.46,8.34 45.02,7.9 43.17,7.9
  Top 0.305: GYRO_Z.C7 43.17,7.89 43.17,7.9 42.39,7.9 GYRO_Z.C6
N$3
  Top 0.203: C2.2 42.92,11.77 41.56,10.41 GYRO_Z.A5
  Top 0.305: GYRO_Z.B5 41.55,8.66 41.52,8.66 41.52,9.44 GYRO_Z.A5
N$4
  Top 0.203: GYRO_Z.A4 40.76,10.5 41.02,10.76 41.02,11.65 41.03,11.66 C2.1
  Top 0.305: GYRO_Z.B4 GYRO_Z.A4
N$5
  Top 0.305: GYRO_Z.E2 39.17,6.26 39.17,6.25 38.39,6.25 GYRO_Z.E1
N$6
  Top 0.203: R27.2 17.78,6.82 17.81,6.86 C39.1 16.67,8.6 R26.1
N$7
  Top 0.203: U$3.P$3 18.79,12.56 18.79,12.54 | C8.2 18.79,11.96 18.79,12.54 | FBW.62 18.8,12.54 18.79,12.54
N$8
  Top 0.203: GYRO_Z.C1 37.17,7.87 36.7,8.34 36.06,8.34 C7.1
  Top 0.305: GYRO_Z.C2 39.17,7.89 39.17,7.9 38.39,7.9 GYRO_Z.C1
N$9  (via drill 0.35)
  Top 0.203: 43.17,7.07 46.1,7.07 v46.6,6.57
  Top 0.305: 43.17,7.07 GYRO_Z.D7 GYRO_Z.D6
  Bottom 0.203: v46.6,6.57 47.37,6.31 C6.1
N$10
  Top 0.203: GYRO_Z.D1 37.21,7.07 36.95,6.82 36.19,6.82 36.18,6.81 C5.1
  Top 0.305: 39.17,7.07 GYRO_Z.D2 GYRO_Z.D1
N$11  (1 unrouted)
N$12  (1 unrouted)
N$13
  Top 0.406: C9_1.2 34.54,28.41 34.54,29.92 C9_2.2 34.54,29.93 34.45,30.02 U$5.P$8 33.36,29.46 33.4,29.43 U$5.P$7 U$5.P$6 33.4,28.66 33.4,28.03 U$5.P$5
N$14
  Bottom 1.422: D1.2 17.7,21.47 17.78,21.55 17.24,22.08 IC3.1
N$15
  Top 0.203: C38.1 19.46,6.73 19.55,6.82 | 19.55,6.82 R27.1 | U$12.3 19.74,7 19.55,6.82
N$16
  Top 0.406: 36.32,29.93 40.76,29.93 41.4,29.3 U$1.6 41.4,27.01 42.92,25.49 U$1.3 | C9_2.1 36.32,29.93 | C9_1.1 36.32,28.42 36.32,29.93
N$17
  Top 0.203: C39.2 20.95,8.6 21.2,8.34 U$12.1 21.2,7.71 U$12.2 22.28,7.65 22.6,7.33 22.6,4.66 R28.2
N$18
  Top 0.203: R28.1 C40.1 | U$12.5 26.07,6.35 25.52,5.8 C40.1 | C40.1
N$19
  Top 0.203: U$12.6 27.05,6.95 | U$12.6 27.75,7 28.95,5.8 C41.+ | U$12.7 U$12.6
N$20
  Top 0.203: R29.1 30.98,9.74 30.5,9.74 C41.-
N$21
  Top 0.203: R30.1 R29.2
N$22  (via drill 0.35)
  Top 0.254: v46.98,11.9 YZ_BOARD.ACCEL_Y
  Bottom 0.203: R3.1 45.71,13.81 45.71,11.9 45.71,11.77 R2.1
  Bottom 0.254: C24.1 45.71,10.25 45.71,11.77 | 45.71,11.9 v46.98,11.9
N$23
  Bottom 0.406: C42.2 28.82,20.03 28.89,20.09 IC1.4
N$26  (1 unrouted)
N$29
  Bottom 0.203: C25.2 43.44,11.77 R2.2
  Bottom 0.254: OA1.2 42.41,10 42.67,10.25 C25.2
N$30  (via drill 0.35)
  Top 0.254: v46.98,7.46 YZ_BOARD.ACCEL_Z
  Bottom 0.203: C26.1 45.59,7.46 45.59,5.68 | 45.59,5.68 R5.1 | R6.1 45.59,3.64 45.59,5.68
  Bottom 0.254: 45.59,7.46 v46.98,7.46
N$31
  Bottom 0.254: OA1.6 42.41,7.46 42.67,7.2 C27.2 43.92,5.54 43.98,5.59 R5.2
N$33  (1 unrouted)
  Bottom 0.254: R9.1 32.29,11.81 32.25,11.77 R8.1 32.29,10.34 32.38,10.25 C28.1
N$34
  Bottom 0.254: OA1.13 35.55,10 35.3,10.25 C29.2 34.05,11.79 34.03,11.77 R8.2
N$35  (2 unrouted)
N$38
  Bottom 0.254: U$4.5 41.78,22.57 | U$4.5 40.89,22.57 40.51,22.19 40.51,20.15 40.8,19.86 R17.1 | R16.2 44.06,22.82 43.81,22.57 U$4.5
N$39
  Bottom 0.254: R13.1 38.98,21.81 40.89,23.84 U$4.3 42.54,23.84 43.94,25.23 44.44,25.23 44.7,25.49 R12.2
N$40
  Bottom 0.254: R15.2 43.52,26.16 43.56,26.12 43.56,25.74 42.29,24.47 U$4.2 | 43.52,28.37 C9_.2 | R15.2 43.52,28.37 | 43.52,28.37 43.56,28.41 | R15.2 R14.2
N$42
  Bottom 0.254: U$4.6 42.67,21.93 42.92,21.68 42.92,20.54 44.32,19.14 | C8_.2 44.32,17.11 44.32,19.14 | 44.32,19.14 R19.2 | R18.2 45.97,19.77 44.95,19.77 44.32,19.14
N$46
  Bottom 0.254: 36.19,22.57 U$4.10 37.46,22.57 | R21.1 37.08,19.9 37.46,20.28 37.46,22.57 | R20.2 38.13,26.8 38.09,26.76 38.22,26.63 38.22,25.87 39.24,24.85 39.24,23.96 37.84,22.57 37.46,22.57
N$47
  Bottom 0.203: C7_.2 33.69,18.21 33.65,18.25 33.69,18.29 R23.2
  Bottom 0.254: U$4.9 34.54,21.93 R22.2 34.5,21.81 34.28,21.81 34.28,20.75 R23.2
OUT+_A  (via drill 0.35)
  Top 0.254: U$1.16 v45.33,21.42
  Bottom 0.254: R16.1 44.99,21.08 v45.33,21.42
OUT+_B  (via drill 0.35)
  Top 0.254: U$1.12 37.33,20.28 37.71,19.9 44.83,19.9 46.35,21.42 46.35,24.47 v46.22,24.6
  Bottom 0.254: R12.1 46.48,25.49 46.73,25.23 v46.22,24.6
OUT+_C  (via drill 0.35)
  Top 0.254: U$1.13 38.86,22.7 v39.24,23.08
  Bottom 0.254: 39.87,26.89 R20.1 39.75,26.89 39.75,23.58 v39.24,23.08
OUT-_A  (via drill 0.35)
  Top 0.254: U$1.10 36.06,25.49 35.68,25.11 35.68,21.04 37.33,19.39 43.94,19.39 v45.08,18.12
  Bottom 0.254: R18.1 45.88,18.42 45.84,18.38 v45.08,18.12
OUT-_B  (via drill 0.35)
  Top 0.254: U$1.4 v46.48,26.76
  Bottom 0.254: R14.1 46.48,27.52 v46.48,26.76
OUT-_C  (via drill 0.35)
  Top 0.254: v36.06,26.76 U$1.9
  Bottom 0.254: R22.1 34.58,23.58 34.92,23.58 34.92,25.62 v36.06,26.76
RATE_X_3V3  (1 unrouted)
  Top 0.203: YZ_BOARD.RATE_X 47.11,23.84 47.11,27.01 43.43,30.7 27.68,30.7 26.92,29.93 21.71,29.93 19.43,27.65
RATE_Y_3V3  (1 unrouted)
RATE_Z
  Top 0.203: R31.1 36.02,10.08 36.06,10.12 C7.2 37.73,10.11 38.76,9.07
  Top 0.305: 39.17,9.49 GYRO_Z.A2 | 39.17,9.49 38.76,9.07 GYRO_Z.B1 | 39.17,9.49
RATE_Z_3V3
  Top 0.203: R32.1 R31.2 34.41,8.47 33.52,8.47 33.27,8.73 33.27,10.38
SET/RESET
  Top 0.406: U$5.P$4 28.15,28.07 28.19,28.28 28.14,29.38 U$5.P$2
SPI0_MISO  (via drill 0.35)
  Top 0.203: FBW.53 16.63,16.73 v16.63,16.47
  Bottom 0.203: AP.53 16.63,12.6 v16.63,16.47
SPI0_MOSI  (via drill 0.35)
  Top 0.203: FBW.54 17.39,16.79 v17.39,15.96
  Bottom 0.203: AP.54 17.39,12.54 v17.39,15.96
SPI0_SCK  (via drill 0.35)  (1 unrouted)
  Top 0.203: FBW.47 23.24,16.37 v23.24,10.88
  Bottom 0.203: AP.47 20.82,10.83 20.82,10.88
SPI0_SS  (via drill 0.35)
  Top 0.203: FBW.55 18.16,16.84 v18.16,15.46
  Bottom 0.203: v18.16,15.46 18.03,15.46 18.03,12.62 AP.55
SPI1_MISO  (1 unrouted)
SPI1_MOSI  (1 unrouted)
SPI1_SCK  (1 unrouted)
SPI1_SS  (1 unrouted)
ST1
  Top 0.305: GYRO_Z.G5 41.58,4.66 41.59,4.66 41.59,5.45 GYRO_Z.F5
ST2
  Top 0.305: GYRO_Z.G4 GYRO_Z.F4
TEMP
  Top 0.203: R33.1 40,2.25 39.94,2.31 39.94,4.66
  Top 0.305: GYRO_Z.G3 39.95,4.66 39.94,4.66 39.94,5.45 GYRO_Z.F3
TEMP_3V3
  Top 0.203: R33.2 R34.1 36.83,2.16 36.83,1.87 36.06,1.1 34.41,1.1 32.76,2.76 32.76,10.18
VBAT_LYPO  (via drill 0.35)
  Top 0.406: X6.1 4.82,26 6.06,26
  Top 1.524: 6.06,26 1.14,26
  Bottom 0.203: IC1.3 28.89,24.79 28.32,25.36 26.99,25.36 | R24.2 5.29,28.62 4.57,27.9 4.57,25.74 | 4.44,25.62 4.57,25.74 | 4.57,25.74 4.57,25.62
  Bottom 0.61: IC1.1 26.99,25.36 26.99,25.49 19.93,25.49
  Bottom 1.016: IC3.3 12.69,23.63 12.69,23.71 9.92,23.71 C18.+ 9.9,23.71 8.01,25.61 8,25.61 8,25.62 | 8,25.62 19.93,25.62 19.93,25.49 19.93,23.63 IC2.3 | 8,25.62 v5.84,25.62 4.44,25.62 | 4.44,25.62 v2.92,25.62 2.15,25.62 | 4.44,25.62 4.57,25.62 | 4.44,25.62 X6.1 | v2.03,25.62 1.9,25.62 | v2.03,25.62 2.15,25.62 | v2.03,25.62 2.15,25.62
  Bottom 1.422: C33.+ 19.93,21.42 19.91,21.45 IC2.3
VBAT_MEAS  (via drill 0.35)
  Top 0.203: FBW.45 17.06,23.96 15.74,23.96 15.36,24.35 v15.36,26.63
  Bottom 0.203: R24.1 7.58,26.92 7.61,26.89 R25.2 9.61,26.92 9.65,26.89 C34.2 9.94,26.63 v15.36,26.63
VS/R
  Top 0.406: U$5.P$3 31.69,28.71 32.25,28.16 32.25,26.89 32.38,26.76 32.51,26.76 C17.+ 33.16,26.76 34.54,26.76 R4.1

## Text on the board
tDocu: Y | X